# Altium PCB Board2.PcbDoc (part 2 of 2)
Units mil, origin at the board's own origin, x right, y up, seen from the top; angles counter-clockwise.
Board outline 9249 x 8662 mil, 4 copper layers (Top Layer, VCC, GND, Bottom Layer); 176 components, 329 nets, 1628 pads, 337 vias.
Unrouted connection lines stored in the file: 397.
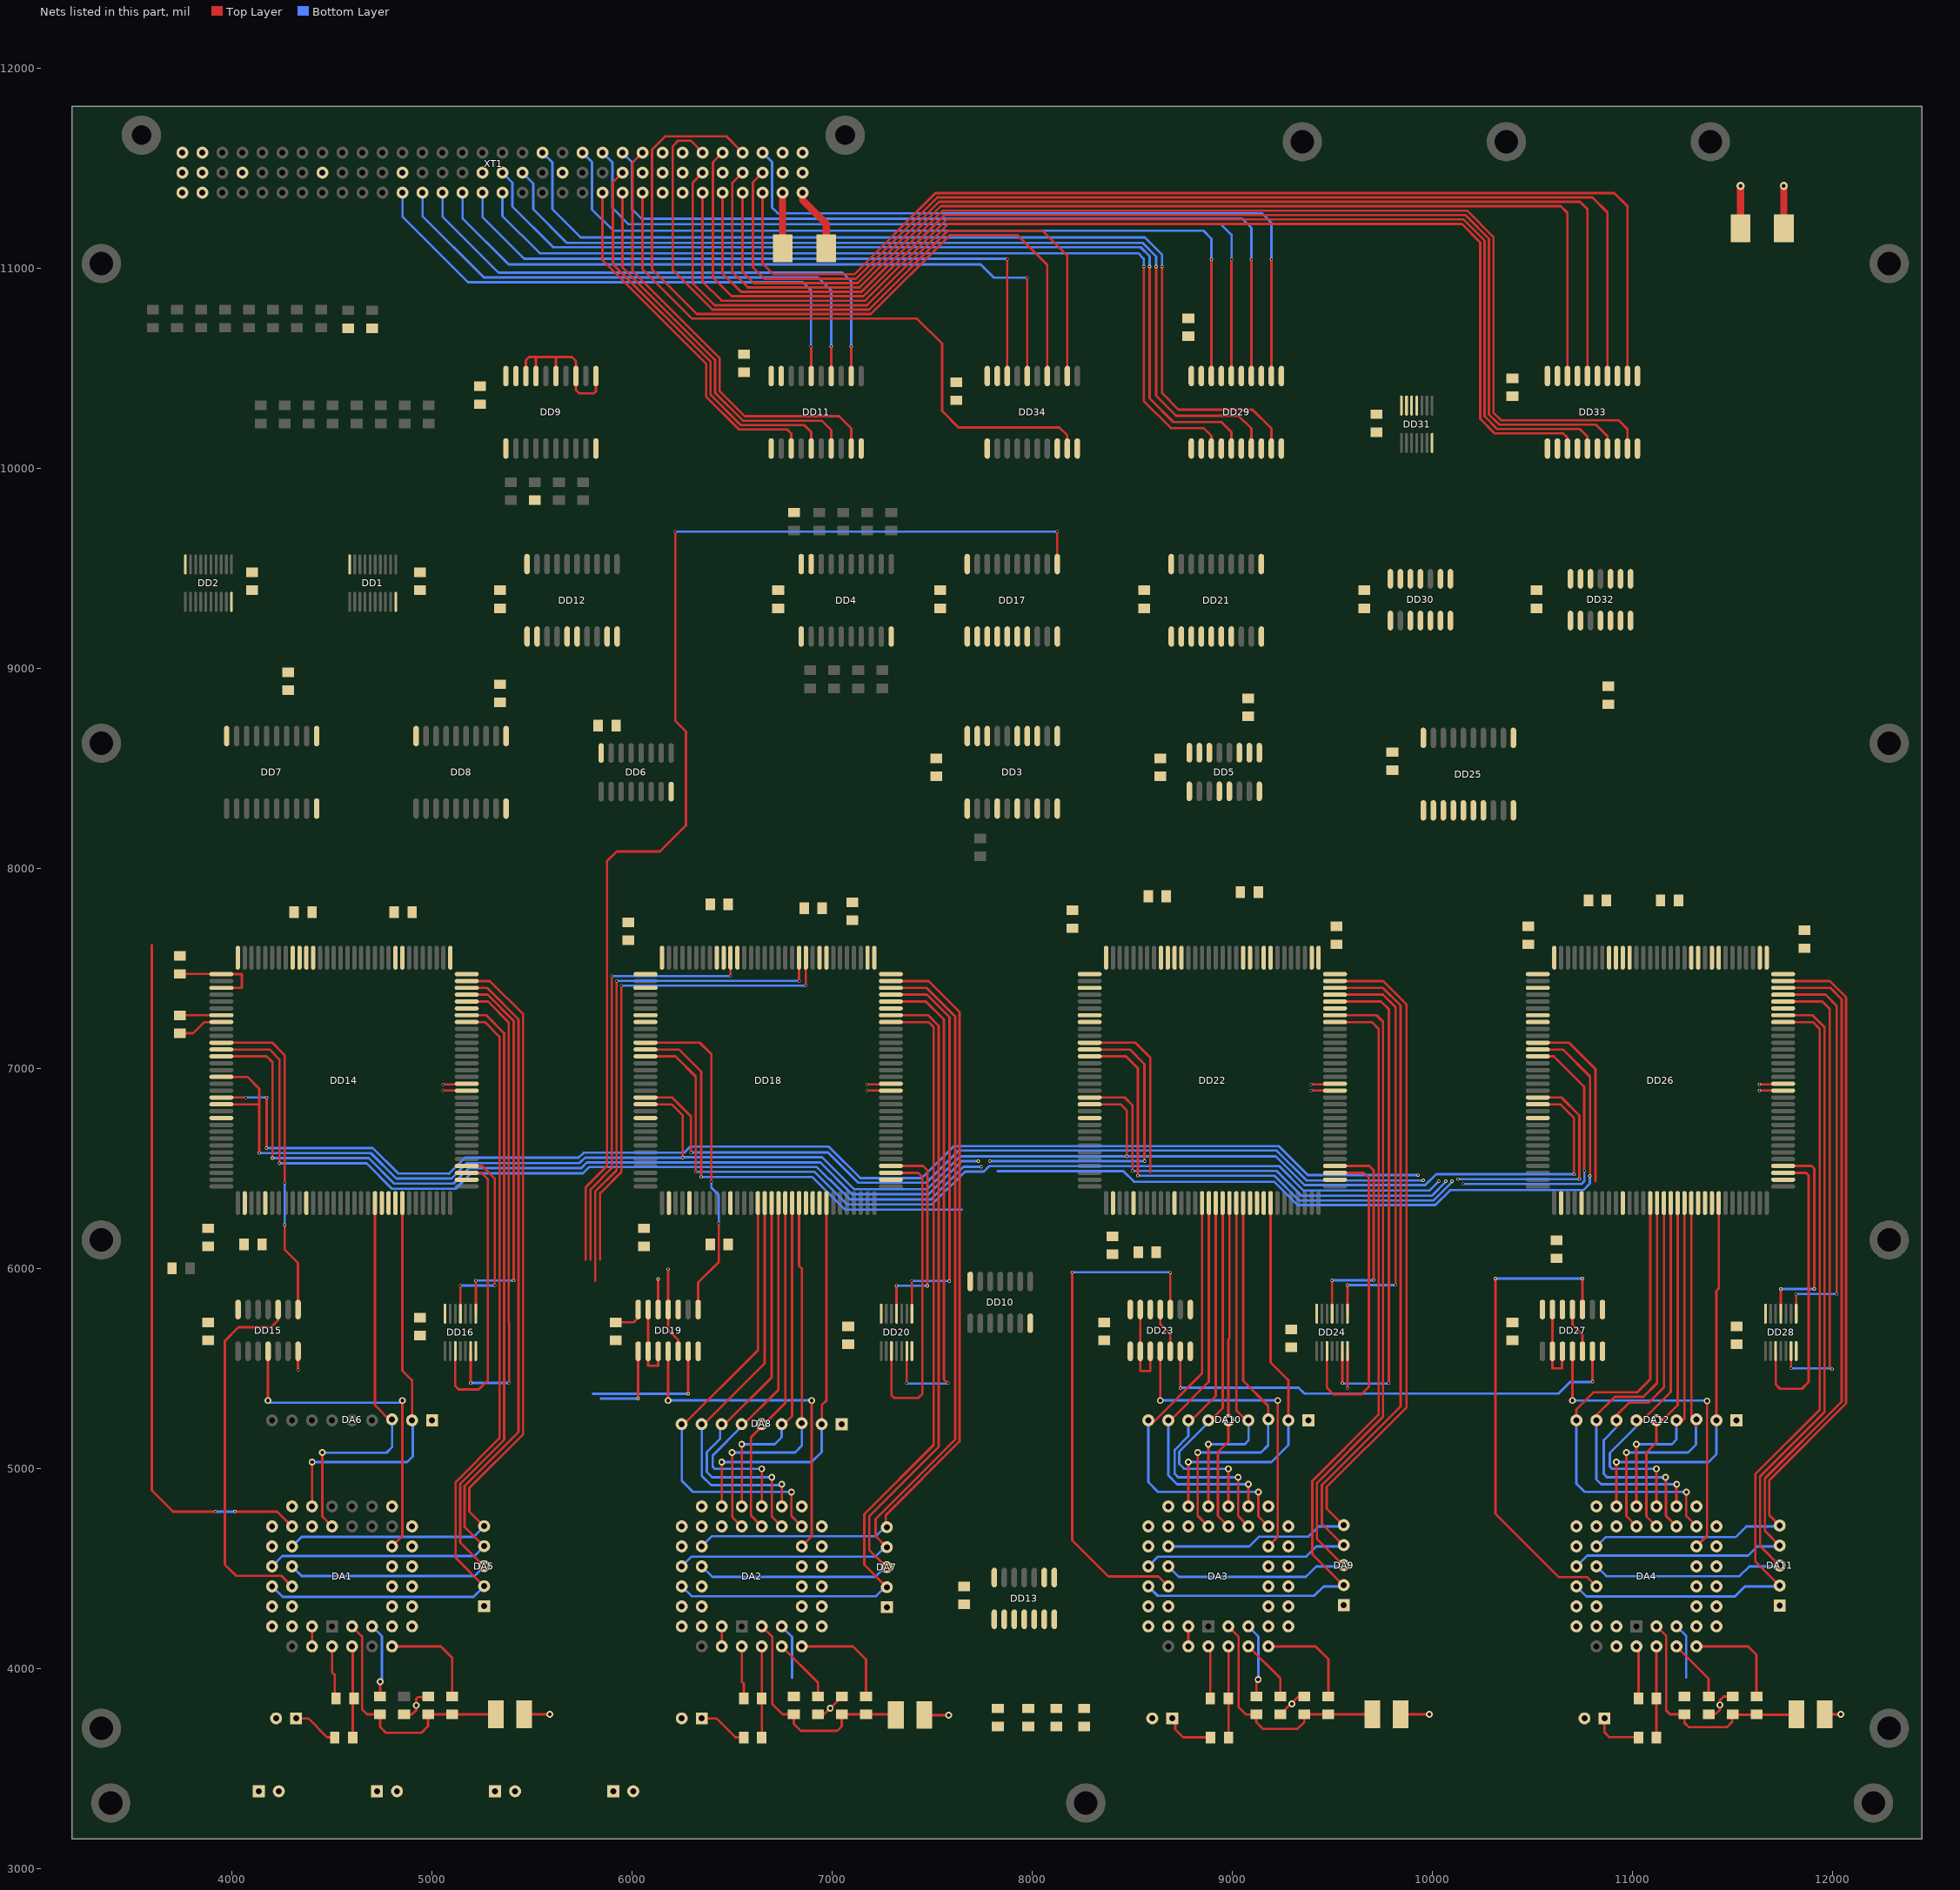
[diagram p4: the nets of this part, all layers, seen from the top]

## Via types
v1: diameter 16, hole 10, Top Layer to Bottom Layer, 289 vias
v2: diameter 34, hole 18, Top Layer to Bottom Layer, 46 vias
v3: diameter 40, hole 20, Top Layer to Bottom Layer, 2 vias

## Nets (pads, with @x,y where several pads share a name; then routed paths per layer and width w, separated by ;. In a path a pad name is that pad's centre, name@x,y a point inside that pad or via, vN(x,y) a via of type N, cw(c..) or ccw(c..) an arc to the next point about the centre after c; other vN are vias at no path point) (continued)
B73: DD11.16 XT1.12C | length 2742.7
  Top Layer w12: DD11.16@6895,10461.1 v1@6895,10609
  Bottom Layer w12: XT1.12C@4852,11378 4852,11258 5180,10930 6853,10930 6894,10889 v1(6894,10609)
B74: DD11.14 XT1.13C | length 2742
  Top Layer w12: DD11.14@6995,10461.1 v1(6995,10609)
  Bottom Layer w12: XT1.13C@4952,11378 4952,11261 5259,10954 6930,10954 6995,10889 v1(6995,10609)
B75: DD11.12 XT1.14C | length 2770.1
  Top Layer w12: DD11.12@7095,10461.1 v1(7095,10609)
  Bottom Layer w12: XT1.14C@5052,11378 5052,11258 5332,10978 7051,10978 7095,10934 v1(7095,10609)
B76: DD11.9 XT1.24A | length 2229
  Top Layer w12: XT1.24A@6052,11578 6002,11528 6002,10986 6437,10551 6437,10386 6563,10260 7035,10260 7095,10200 DD11.9@7095,10098.9
B77: DD11.7 XT1.23C | length 1942.5
  Top Layer w12: XT1.23C@5952,11378 5952,11004 6414.37,10541.63 6414.37,10376.63 6553,10238 6948,10238 6995,10191 DD11.7@6995,10098.9
B78: DD11.5 XT1.23B | length 1994.9
  Top Layer w12: XT1.23B@5952,11478 5904,11430 5904,11020.44 6392.06,10532.39 6392.06,10367.39 6543.44,10216 6860,10216 6895,10181 DD11.5@6895,10098.9
B79: DD11.3 XT1.22C | length 1810.9
  Top Layer w12: XT1.22C@5852,11378 5852,11041 6369.82,10523.18 6369.82,10358.18 6534,10194 6775,10194 6795,10174 DD11.3@6795,10098.9
B80: DD12.2 DD30.1 DD30.4 DD30.5
B81: DD12.5 DD31.13
B82: DD12.6 DD29.11
B83: DD12.9 DD29.15
B84: DD14.99 DD16.3 | length 1486.9
  Top Layer w12: DD16.3@5116.02,5586.5 5116.02,5411.98 5133,5395 5233,5395 5279,5441 5279,6445 5246.4,6477.6 DD14.99@5173.19,6477.6
B85: DD14.125 DD16.8 | length 1942.2
  Top Layer w12: DD14.125@5173.19,7368.15 5276.85,7368.15 5408,7237 v1(5408,5939) ; DD16.8@5218.39,5773.5 v1(5218.39,5939)
  Bottom Layer w12: v1(5218.39,5939) v1(5408,5939)
B86: DD14.124 DD16.6 | length 2410.4
  Top Layer w12: DD14.124@5173.19,7333.9 5279.1,7333.9 5382.53,7230.47 5382.53,5729.47 5385,5727 v1(5385,5426) ; v1(5192.8,5426) DD16.6@5192.8,5586.5
  Bottom Layer w12: v1@5192.8,5427 v1@5385,5427
B87: DD14.100 DD16.11 | length 1011.3
  Top Layer w12: DD16.11@5141.61,5773.5 v1(5141.61,5913.61) ; DD14.100@5173.19,6511.85 5250.15,6511.85 5313,6449 v1(5313,5915)
  Bottom Layer w12: v1(5141.61,5913.61) v1@5313,5913.61
B88: DD13.1 DD14.44 | length 4569.6
  Top Layer w12: DD14.44@3946.81,7094.13 4187.43,7094.13 4236.75,7044.81 v1@4236.75,6525
  Bottom Layer w12: v1(4237,6525) 4672.52,6525 4799.52,6398 5117.77,6398 5194.77,6475 5754,6475 5786,6507 6922,6507 6986,6443 6989.81,6443 7087.81,6345 7493.77,6345 7656.77,6508 v1(7744,6508)
B89: DD14.48 DD14.52 DD18.52 DD22.52 DD26.52 DD29.13 | length 8946.1
  Top Layer w12: DD14.52@3946.81,6820.12 4136,6820.12 ; DD14.48@3946.81,6957.13 4076.87,6957.13 4136,6898 v1@4136,6578 ; DD18.52@6066.81,6820.12 6196.88,6820.12 6253,6764 v1(6253,6553) ; DD22.52@8286.81,6820.12 8440.88,6820.12 8473,6788 v1(8473,6560) ; DD26.52@10526.81,6820.12 10639.88,6820.12 10708,6752 v1@10708,6471
  Bottom Layer w12: v1(4136,6576) 4693.64,6576 4820.64,6449 5096.64,6449 5173.64,6526 5737,6526 5764,6553 v1(6253,6553) ; v1@6253,6555 6949.94,6555 7108.94,6396 7475,6396 7639,6560 9217,6560 9361,6416 9964,6416 10019,6471 v1@10709,6471
  other v1: 10709,6470
B90: DA1.30 DD14.22 | length 3501.6
  Top Layer w12: 3599,7616 3599,4890 3705,4784 v1(3917,4784) ; v1(4014,4784) 4226,4784 DA1.30@4300,4710
  Bottom Layer w12: v1(3917,4784) v1(4014,4784)
B91: DA2.30 DD18.22 | length 2146.7
  Top Layer w12: 5792,6044 5792,6395.06 5898,6501.06 v1(5898,7461) ; v1(6491.61,7461) DD18.22@6491.61,7553.19
  Bottom Layer w12: v1(5898,7461) v1(6491.61,7461)
B92: DA3.30 DD22.22
B93: DA4.30 DD26.22
B94: LED1.1 R35.2
B95: LED2.1 R41.2
B96: LED3.1 R47.2
B97: LED4.1 R53.1
B98: DD14.51 DD32.9 | length 6535.5
  Top Layer w12: DD14.51@3946.81,6854.37 v1(4069.63,6854.37) ; v1@4172.63,6601 v1@4172.63,6854.37
  Bottom Layer w12: v1(4069.63,6854.37) v1@4172.63,6854.37 ; v1@4172.63,6601 4704,6601 4831,6474 5083.95,6474 ; 5083.95,6472.37 5164.58,6553 5732.53,6553 5757.53,6578 6259,6578 6290,6609 6982,6609 7140,6451 7448,6451 7608,6611 9231.89,6611 9376.89,6466 v1(9928,6466)
  other v1: 4172,6601 4173,6854
B99: DD18.51 DD32.10 | length 4299
  Top Layer w12: DD18.51@6066.81,6854.37 6199.63,6854.37 6294,6760 v1(6294,6579)
  Bottom Layer w12: v1@6294,6580 6979,6580 7131,6428 7470,6428 7631,6589 9222,6589 9371.94,6439.06 v1(9954,6440.05)
B100: DD22.51 DD32.12 | length 2199.6
  Top Layer w12: DD22.51@8286.81,6854.37 8461.63,6854.37 8501,6815 v1@8501,6493
  Bottom Layer w12: v1(8501,6487) 9221,6487 9345,6363 9997,6363 v1@10067.5,6433.5
  other v1: 10067.5,6436
B101: DD26.51 DD32.13 | length 1167.6
  Top Layer w12: DD26.51@10526.81,6854.37 10644.63,6854.37 10735,6764 v1@10735,6449
  Bottom Layer w12: v1(10128,6446) v1(10735,6446)
B102: DD14.45 DD29.17 | length 4506.3
  Top Layer w12: DD14.45@3946.81,7059.88 4173.24,7059.88 4202.5,7030.62 v1@4202.5,6551
  Bottom Layer w12: v1(4201,6551) 4683.29,6551 4810.29,6424 5107,6424 5184,6501 5745.88,6501 5773.88,6529 6940.58,6529 7098.58,6371 7483,6371 7648,6536 v1(7730,6536)
B103: DD18.45 DD32.1 | length 4699.6
  Top Layer w12: DD18.45@6066.81,7059.88 6217.12,7059.88 6318,6959 v1(6318,6483)
  Bottom Layer w12: v1(6318,6483) 6911,6483 7074,6320 7500,6320 7664,6484 7758,6484 7785,6511 9234,6511 9356,6389 9985,6389 v1(10032,6436)
B104: DD22.45 DD32.2 | length 2462
  Top Layer w12: DD22.45@8286.81,7059.88 8468.12,7059.88 8528,7000 v1(8528,6463)
  Bottom Layer w12: v1(8528,6463) 9211.06,6463 9335.06,6339 10005,6339 10096,6430 v1@10098,6430
  other v1: 10098,6436
B105: DD26.45 DD32.4 | length 1380.3
  Top Layer w12: DD26.45@10526.81,7059.88 10607.12,7059.88 10759,6908 v1@10759,6488
  Bottom Layer w12: v1(10153,6422) 10745,6422 10760,6437 v1(10760,6489)
B106: C45.2 P1.1 | length 232.4
  Top Layer w12: P1.1@4320,3750 4381,3750 4476,3655 C45.2@4513,3655
B107: C49.2 P2.1 | length 249.4
  Top Layer w12: P2.1@6348,3750 6421,3750 6516,3655 C49.2@6558,3655
B108: C53.2 P3.1 | length 254.4
  Top Layer w12: P3.1@8700,3750 8715,3735 8715,3694 8754,3655 C53.2@8891,3655
B109: C57.2 P4.1 | length 250.4
  Top Layer w12: P4.1@10860,3750 10860,3680 10884,3656 11029,3656 C57.2@11030,3655
B110: C1.2 C47.1 C51.1 C55.1 C59.1 DA1.44 DA2.44 DA3.44 DA4.44 P1.2 P2.2 P3.2 P4.2 R36.1 R37.2 R42.1 R43.2 R48.1 R49.2 R54.1 R55.2 XT1.26A XT1.26B XT1.26C | length 1963.5
  Top Layer w12: DA1.44@4500,4110 4500,3982 4513,3969 R36.1@4513,3855 ; R37.2@4860,3770 4900,3770 4921,3791 4921,3848 4929,3856 4976,3856 C47.1@4980,3860 ; DA2.44@6548,4110 6548,3934 6558,3924 R42.1@6558,3850 ; R43.2@6929,3770 6959,3770 C51.1@7049,3860 ; DA3.44@8880,4110 8890,4100 R48.1@8890,3850 ; R49.2@9240,3770 9330,3860 C55.1@9360,3860 ; DA4.44@11021,4119 11030,4110 R54.1@11030,3850 ; R55.2@11381,3770 11385,3774 11418,3774 11437,3793 11437,3841 11456,3860 C59.1@11501,3860
  Top Layer w36: C1.2@11756.54,11200 v3@11756.54,11411.46
  other v2: 6990,3801 4921,3815 11437,3817 9297,3823
  other v3: 11756,11412
B111: DD17.11 DD19.1 | length 6488
  Top Layer w12: 5768,6044 5768,6405 5874,6511 5874,8035 5923,8084 6138,8084 6269,8215 6269,8684 6216,8737 v1(6216,9683) ; v1(6030,5349) DD19.1@6030,5585.67 ; DD17.11@8125,9521.1 v1(8125,9683)
  Bottom Layer w12: 5844,5349 v1(6030,5349) ; v1(6216,9683) v1(8125,9683)
B112: DD21.11 DD23.1
B113: DD25.11
B114: DA2.19 DA8.9 DD17.3 DD18.79 | length 2310.6
  Top Layer w12: DA8.9@6248,5210 6628.62,5590.62 DD18.79@6628.62,6326.81 ; v2(6796,4882) 6796,4762 DA2.19@6848,4710
  Bottom Layer w12: DA8.9@6248,5210 6248,4939 6305,4882 v2(6796,4882)
B115: DA2.20 DA8.8 DD17.4 DD18.80 | length 2026.8
  Top Layer w12: DA8.8@6348,5210 6662.87,5524.87 DD18.80@6662.87,6326.81 ; DA2.20@6748,4810 v2(6748,4921)
  Bottom Layer w12: DA8.8@6348,5210 6348,4963 6395,4916 6743,4916 v2(6748,4921)
B116: DA2.21 DA8.7 DD17.7 DD18.81 | length 2081.5
  Top Layer w12: DA8.7@6448,5205 6697.13,5454.13 DD18.81@6697.13,6326.81 ; v2(6698,4955) 6698,4760 DA2.21@6748,4710
  Bottom Layer w12: DA8.7@6448,5205 6440,5197 6440,5148 6373,5081 6373,4981 6399,4955 v2(6698,4955)
B117: DA3.19 DA10.9 DD21.3 DD22.79 | length 2284.3
  Top Layer w12: DA10.9@8580,5230 8604.19,5230 8848.62,5474.44 DD22.79@8848.62,6326.81 ; v2(9130,4882) 9130,4760 DA3.19@9180,4710
  Bottom Layer w12: DA10.9@8580,5230 8580,4931 8629,4882 v2(9130,4882)
B118: DA3.20 DA10.8 DD21.4 DD22.80 | length 1975.1
  Top Layer w12: DA10.8@8680,5230 8882.87,5432.87 DD22.80@8882.87,6326.81 ; DA3.20@9080,4810 v2(9080,4921)
  Bottom Layer w12: DA10.8@8680,5230 8680,4965 8724,4921 v2(9080,4921)
B119: DA3.21 DA10.7 DD21.7 DD22.81 | length 2029.9
  Top Layer w12: DA10.7@8780,5225 8917.13,5362.13 DD22.81@8917.13,6326.81 ; v2(9029,4955) 9029,4761 DA3.21@9080,4710
  Bottom Layer w12: DA10.7@8780,5225 8780,5161.11 8712,5093.11 8712,4972 8729,4955 v2(9029,4955)
B120: DA4.19 DA12.9 DD25.3 DD26.79 | length 2442.7
  Top Layer w12: 10720,5210 10720,5295 10805,5380 11023,5380 11088.62,5445.62 DD26.79@11088.62,6326.81 ; v2(11269,4882) 11269,4761 DA4.19@11320,4710
  Bottom Layer w12: 10720,5210 10720,4924 10762,4882 v2(11269,4882)
B121: DA4.20 DA12.8 DD25.4 DD26.80 | length 2113.6
  Top Layer w12: 10820,5210 10820,5266 10912,5358 11055,5358 11122.87,5425.87 DD26.80@11122.87,6326.81 ; DA4.20@11220,4810 v2@11220,4921
  Bottom Layer w12: 10820,5210 10820,4944 10843,4921 v2(11221,4921)
B122: DA4.21 DA12.7 DD25.7 DD26.81 | length 2119.9
  Top Layer w12: 10920,5205 10920,5265 10983,5328 11081,5328 11157.13,5404.13 DD26.81@11157.13,6326.81 ; v2@11167,4955 11167,4763 DA4.21@11220,4710
  Bottom Layer w12: 10920,5205 10856,5141 10856,4972 10873,4955 v2(11165,4955)
B123: DD17.2 DD29.4
B124: DD17.5 DD29.6
B125: DD17.6 DD29.8
B126: DD21.2 DD33.6
B127: DD21.5 DD33.8
B128: DD21.6 DD33.11
B129: DD25.2 DD33.13
B130: DD25.5 DD33.15
B131: DD25.6 DD33.17
B132: DD18.99 DD20.3 | length 1639.2
  Top Layer w12: DD18.99@7293.19,6477.6 7429.4,6477.6 7451,6456 7451,5373 7430,5352 7311,5352 7296.02,5366.98 DD20.3@7296.02,5586.5
B133: DD18.125 DD20.8 | length 2009.4
  Top Layer w12: DD18.125@7293.19,7368.15 7473.85,7368.15 7586,7256 v1(7586,5936) ; DD20.8@7398.39,5773.5 v1(7398.39,5937)
  Bottom Layer w12: v1(7398.39,5937) v1@7585,5937
B134: DD18.124 DD20.6 | length 2497.2
  Top Layer w12: DD18.124@7293.19,7333.9 7468.1,7333.9 7558,7244 7558,5445 v1@7579,5424 ; v1(7372.8,5426) DD20.6@7372.8,5586.5
  Bottom Layer w12: v1@7372.8,5424 v1@7578.8,5424
  other v1: 7579,5426
B135: DD18.100 DD20.11 | length 1062.7
  Top Layer w12: DD18.100@7293.19,6511.85 7454.15,6511.85 7476,6490 v1(7476,5912) ; DD20.11@7321.61,5773.5 v1(7321.61,5912.61)
  Bottom Layer w12: v1(7321.61,5912.61) v1@7475.39,5912.61
B136: DD22.99 DD24.3 | length 1645.7
  Top Layer w12: DD24.3@9473.02,5586.5 9473.02,5401.98 9504,5371 9645,5371 9682,5408 9682,6453 9657.4,6477.6 DD22.99@9513.19,6477.6
B137: DD22.125 DD24.8 | length 2100.5
  Top Layer w12: DD22.125@9513.19,7368.15 9752.85,7368.15 9816,7305 v1(9816,5917) ; DD24.8@9575.39,5773.5 v1(9575.39,5916)
  Bottom Layer w12: v1(9575.39,5916) 9815,5916 v1(9816,5917)
B138: DD22.124 DD24.6 | length 2547.2
  Top Layer w12: DD22.124@9513.19,7333.9 9744.1,7333.9 9782,7296 v1(9782,5426) ; v1(9549.8,5426) DD24.6@9549.8,5586.5
  Bottom Layer w12: v1@9549.8,5424 v1@9782,5424
B139: DD22.100 DD24.11 | length 1126.1
  Top Layer w12: DD24.11@9498.61,5773.5 v1(9498.61,5940.61) ; DD22.100@9513.19,6511.85 9685.15,6511.85 9706,6491 v1(9706,5941)
  Bottom Layer w12: v1(9498.61,5940.61) 9705.61,5940.61 v1(9706,5941)
B140: DD26.99 DD28.3 | length 1520.7
  Top Layer w12: DD28.3@11716.02,5586.5 11716.02,5419.98 11738,5398 11847,5398 11881,5432 11881,6465 11868.4,6477.6 DD26.99@11753.19,6477.6
B141: DD26.125 DD28.8 | length 2032.4
  Top Layer w12: DD26.125@11753.19,7368.15 11965.85,7368.15 12021,7313 v1(12021,5872) ; DD28.8@11818.39,5773.5 v1(11818.39,5871.39)
  Bottom Layer w12: v1(11818.39,5871.39) 12020.39,5871.39 v1(12021,5872)
B142: DD26.124 DD28.6 | length 2341.4
  Top Layer w12: DD26.124@11753.19,7333.9 11949.1,7333.9 11986,7297 11986,5508 v1(11998,5496) ; v1(11792.8,5500.2) DD28.6@11792.8,5586.5
  Bottom Layer w12: v1(11792.8,5500.2) v1@11993.8,5500.2
B143: DD26.100 DD28.11 | length 1053.2
  Top Layer w12: DD28.11@11741.61,5773.5 v1@11741.61,5894.61 ; DD26.100@11753.19,6511.85 11896.15,6511.85 11909,6499 v1@11909,5895
  Bottom Layer w12: v1(11741.61,5896.61) v1@11908.61,5896.61
  other v1: 11909,5897
B144: DD18.11 DD19.6 | length 3163.8
  Top Layer w12: 5840,6044 5840,6375.18 5946,6481.18 v1(5946,7413) ; v1(6280,5373) DD19.6@6280,5585.67 ; v1@6868.39,7413 DD18.11@6868.39,7553.19
  Bottom Layer w12: 5804,5373 v1(6280,5373) ; v1(5946,7413) v1(6868,7413)
B145: DD18.12 DD19.12 | length 2722.8
  Top Layer w12: 5816,5938 5816,6385.12 5922,6491.12 v1(5922,7437) ; DD19.12@6130,5794.33 v1(6130,5947) ; v1@6834.13,7434 DD18.12@6834.13,7553.19
  Bottom Layer w12: v1@5927,7437 v1(6835,7437)
B146: DD22.11
B147: DD22.12 DD23.12
B148: DD23.6 DD26.11 DD27.6 | length 2424.9
  Top Layer w12: v1@8740,5404 DD23.6@8740,5585.67 ; v1@10800,5440 DD27.6@10800,5585.67
  Bottom Layer w12: v1@8740,5403 9331,5403 9360,5374 10630,5374 10688,5432 10793,5432 v1@10799,5438
  other v1: 8740,5401 10801,5434
B149: DD26.12 DD27.12
B150: DD29.7 XT1.18B | length 4756.5
  Top Layer w12: v1(8619,11008) 8619,10362.57 8718.57,10263 9031,10263 9095,10199 DD29.7@9095,10098.9
  Bottom Layer w12: XT1.18B@5452,11478 5506,11424 5506,11295 5674,11127 8551.11,11127 8619,11059.11 v1(8619,11008)
B151: DD13.3 DD18.44 | length 2219.7
  Top Layer w12: DD18.44@6066.81,7094.13 6233.87,7094.13 6345,6983 v1(6345,6457)
  Bottom Layer w12: v1(6345,6457) 6900.23,6457 7063.23,6294 7647,6294
B152: DD13.5 DD22.44 | length 1559.5
  Top Layer w12: DD22.44@8286.81,7094.13 8487.87,7094.13 8561,7021 v1@8561,6539
  Bottom Layer w12: v1(7788,6536) v1(8561,6536)
B153: DD13.9 DD26.44 | length 3925.3
  Top Layer w12: DD26.44@10526.81,7094.13 10652.87,7094.13 10788,6959 v1@10788,6464
  Bottom Layer w12: 7827,6486 8455,6486 8508,6433 9209,6433 9326,6316 10014,6316 10089,6391 10754,6391 10787,6424 v1(10787,6462)
B154: DD34.18 XT1.16C | length 3417.1
  Top Layer w12: DD34.18@7875,10461.1 v1(7875,11047)
  Bottom Layer w12: XT1.16C@5252,11378 5252,11256 5460,11048 v1@7875,11048
B155: DD34.16 XT1.15C | length 3565.9
  Top Layer w12: DD34.16@7975,10461.1 v1(7975,10953)
  Bottom Layer w12: XT1.15C@5152,11378 5152,11250 5383,11019 7742,11019 7808,10953 v1(7975,10953)
B156: DD34.14 XT1.29A | length 3962.1
  Top Layer w12: XT1.29A@6552,11578 6470,11660 6166,11660 6099,11593 6099,10995 6323,10771 7193.11,10771 7588.11,11166 7925,11166 8075,11016 DD34.14@8075,10461.1
B157: DD32.6 DD33.2 DD34.8
B158: DD34.12 XT1.27A | length 3675.2
  Top Layer w12: XT1.27A@6352,11578 6292,11638 6231,11638 6203,11610 6203,10991 6401,10793 7184,10793 7579,11188 8049,11188 8175,11062 DD34.12@8175,10461.1
B159: DD34.9 XT1.24C | length 3112.1
  Top Layer w12: XT1.24C@6052,11378 6052,10996 6300,10748 7424,10748 7549,10623 7549,10286 7631,10204 8135,10204 8175,10164 DD34.9@8175,10098.9
B160: DD3.14 DD5.5
C02: DD32.8 DD33.4
D01: DD29.18 XT1.21A | length 4146.8
  Top Layer w12: DD29.18@8895,10461.1 v1(8895,11044)
  Bottom Layer w12: XT1.21A@5752,11578 5799,11531 5799,11294 5905,11188 8855,11188 8895,11148 v1(8895,11044)
D02: DD29.9 XT1.19A | length 4856.9
  Top Layer w12: v1(8649,11008) 8649,10375 8731,10293 9101,10293 9195,10199 DD29.9@9195,10098.9
  Bottom Layer w12: XT1.19A@5552,11578 5601,11529 5601,11295 5742,11154 8562.3,11154 8649,11067.3 v1(8649,11008)
D03: DD29.16 XT1.22A | length 4152.7
  Top Layer w12: DD29.16@8995,10461.1 v1@8995,11043
  Bottom Layer w12: XT1.22A@5852,11578 5901,11529 5901,11301 5982,11220 8943,11220 8996,11167 v1(8996,11044)
D04: DD29.14 XT1.23A | length 4176.7
  Top Layer w12: DD29.14@9095,10461.1 v1(9095,11044)
  Bottom Layer w12: XT1.23A@5952,11578 5998,11532 5998,11298 6048,11248 9049,11248 9095,11202 v1(9095,11044)
D05: DD29.12 XT1.30A | length 3587.8
  Top Layer w12: DD29.12@9195,10461.1 v1(9195,11044)
  Bottom Layer w12: XT1.30A@6652,11578 6699,11531 6699,11303 6727,11275 9147,11275 9195,11227 v1(9195,11044)
D06: DD29.5 XT1.17B | length 4748.9
  Top Layer w12: v1(8587,11008) 8587,10349.32 8705.32,10231 8945,10231 8995,10181 DD29.5@8995,10098.9
  Bottom Layer w12: XT1.17B@5352,11478 5402,11428 5402,11308 5605,11105 8542,11105 8587,11060 v1(8587,11008)
D07: DD29.3 XT1.17C | length 4595.2
  Top Layer w12: v1(8557,11008) 8557,10336.89 8692.89,10201 8857,10201 8895,10163 DD29.3@8895,10098.9
  Bottom Layer w12: XT1.17C@5352,11378 5352,11261 5538,11075 8529.57,11075 8557,11047.57 v1(8557,11008)
D08: DD33.18 XT1.29B | length 5722
  Top Layer w12: XT1.29B@6552,11478 6500,11426 6500,10983 6579,10904 7137.23,10904 7543.23,11310 10642,11310 10675,11277 DD33.18@10675,10461.1
D09: DD33.16 XT1.29C | length 5659.3
  Top Layer w12: XT1.29C@6552,11378 6552,10982.58 6608.58,10926 7128.11,10926 7534.11,11332 10738,11332 10775,11295 DD33.16@10775,10461.1
D10: DD33.14 XT1.30B | length 5805.1
  Top Layer w12: XT1.30B@6652,11478 6604,11430 6604,11004.12 6660.12,10948 7119,10948 7525,11354 10800,11354 10875,11279 DD33.14@10875,10461.1
D11: DD33.12 XT1.30C | length 5743.8
  Top Layer w12: XT1.30C@6652,11378 6652,11024 6706,10970 7109.89,10970 7515.89,11376 10909,11376 10975,11310 DD33.12@10975,10461.1
D12: DD33.9 XT1.28C | length 6197.1
  Top Layer w12: XT1.28C@6452,11378 6452,10973.88 6543.88,10882 7146.34,10882 7552.34,11288 10174,11288 10305,11157 10305,10278 10343,10240 10930,10240 10975,10195 DD33.9@10975,10098.9
D13: DD33.7 XT1.28A | length 6356.7
  Top Layer w12: XT1.28A@6452,11578 6404,11530 6404,10954 6498,10860 7155.45,10860 7561.45,11266 10164.89,11266 10283,11147.89 10283,10268.89 10333.89,10218 10818,10218 10875,10161 DD33.7@10875,10098.9
D14: DD33.5 XT1.27C | length 6100.3
  Top Layer w12: XT1.27C@6352,11378 6352,10932.46 6446.46,10838 7164.56,10838 7570.56,11244 10155.77,11244 10261,11138.77 10261,10259.77 10324.77,10196 10738,10196 10775,10159 DD33.5@10775,10098.9
D15: DD33.3 XT1.27B | length 6173.3
  Top Layer w12: XT1.27B@6352,11478 6303,11429 6303,10924 6412,10815 7174,10815 7580,11221 10147,11221 10239,11129 10239,10247 10312,10174 10655,10174 10675,10154 DD33.3@10675,10098.9
DD19_5: DD18.2 DD19.5 DD19.11 | length 431
  Top Layer w12: v1(6180,5996) 6180,5692 6230,5642 DD19.5@6230,5585.67
DD19_8: DD18.43 DD19.8 | length 1687
  Top Layer w12: DD18.43@6066.81,7128.39 6337.61,7128.39 6396,7070 v1(6396,6433) ; DD19.8@6330,5794.33 6330,5929 6433,6032 v1(6433,6224)
  Bottom Layer w12: v1(6396,6433) 6396,6403 6433,6366 v1(6433,6224)
DD19_13: DD19.2 DD19.3 DD19.13 | length 412.7
  Top Layer w12: DD19.13@6080,5803 6080,5513 6130,5513 DD19.3@6130,5585.67
DD31_11: DD29.2 DD31.11
GND: C2.2 C3.1 C4.1 C5.1 C6.1 C7.1 C8.1 C9.1 C10.1 C11.1 C12.1 C13.1 C14.1 C15.1 C16.1 C17.1 C18.1 C19.1 C20.1 C21.1 C22.1 C23.1 C24.1 C25.1 C26.1 C27.1 C28.1 C29.1 C30.1 C31.1 C32.1 C33.1 C34.1 C35.1 C36.1 C37.1 C38.1 C39.1 C40.1 C41.1 C42.1 C43.1 C61.1 DA1.7 DA1.8 DA1.9 DA1.10 DA1.11 DA1.12 DA1.13 DA1.14 DA1.15 DA1.18 DA1.27 DA1.29 DA1.31 DA1.37 DA1.38 DA1.41 DA1.42 DA1.43 DA2.7 DA2.8 DA2.9 DA2.10 DA2.11 DA2.12 DA2.13 DA2.14 DA2.15 DA2.18 DA2.27 DA2.29 DA2.31 DA2.37 DA2.38 DA2.41 DA2.42 DA2.43 DA3.7 DA3.8 DA3.9 DA3.10 DA3.11 DA3.12 DA3.13 DA3.14 DA3.15 DA3.18 DA3.27 DA3.29 DA3.31 DA3.37 DA3.38 DA3.41 DA3.42 DA3.43 DA4.7 DA4.8 DA4.9 DA4.10 DA4.11 DA4.12 DA4.13 DA4.14 DA4.15 DA4.18 DA4.27 DA4.29 DA4.31 DA4.37 DA4.38 DA4.41 DA4.42 DA4.43 DD1.10 DD2.10 DD3.1 DD3.10 DD3.19 DD4.1 DD4.10 DD4.19 DD5.1 DD5.8 DD5.9 DD5.10 DD5.14 DD5.15 DD6.8 DD7.1 DD7.10 DD8.1 DD8.10 DD9.1 DD9.10 DD9.19 DD10.7 DD11.1 DD11.10 DD11.19 DD12.1 DD12.10 DD13.7 DD14.1 DD14.8 DD14.21 DD14.23 DD14.32 DD14.40 DD14.54 DD14.75 DD14.86 DD14.88 DD14.98 DD14.112 DD14.123 DD14.128 DD15.7 DD16.7 DD17.1 DD17.10 DD18.8 DD18.21 DD18.23 DD18.32 DD18.40 DD18.54 DD18.75 DD18.86 DD18.88 DD18.98 DD18.112 DD18.123 DD18.128 DD19.7 DD20.7 DD21.1 DD21.10 DD22.1 DD22.8 DD22.21 DD22.23 DD22.32 DD22.40 DD22.54 DD22.75 DD22.86 DD22.88 DD22.98 DD22.112 DD22.123 DD23.7 DD24.7 DD25.1 DD25.10 DD26.8 DD26.21 DD26.23 DD26.32 DD26.40 DD26.54 DD26.75 DD26.86 DD26.88 DD26.98 DD26.112 DD26.123 DD27.7 DD28.7 DD29.1 DD29.10 DD29.19 DD30.7 DD31.7 DD32.7 DD33.1 DD33.10 DD33.19 DD34.1 DD34.10 DD34.19 XT1.2A XT1.2B XT1.2C XT1.4B XT1.8B XT1.12B XT1.16B XT1.20B XT1.24B XT1.28B XT1.31A XT1.31B XT1.31C | length 1568.9
  Top Layer w12: C27.1@3740,7175 3806,7175 3862.14,7231.14 DD14.40@3946.81,7231.14 ; v1@4330,5493 DD15.7@4330,5585.67 ; DA1.42@4400,4110 DA1.43@4400,4210 ; v1(5055,6920) DD14.112@5170.31,6920 ; DA2.42@6448,4110 DA2.43@6448,4210 ; v1(7175,6920) DD18.112@7290.31,6920 ; DA3.42@8780,4110 8780,4213 DA3.43@8795,4228 ; v1(9395,6920) DD22.112@9510.31,6920 ; v1@9575.39,5402.39 DD24.7@9575.39,5586.5 ; v1(11635,6920) DD26.112@11750.31,6920
  Top Layer w36: C2.2@6752,11101.46 XT1.31C@6752,11378
  other v1: 9575.39,5399.39 4331,5491
H04: DA2.22 DA8.6 DD18.82 | length 1892.6
  Top Layer w12: DA8.6@6548,5210 6731.38,5393.38 DD18.82@6731.38,6326.81 ; DA2.22@6648,4810 v2(6648,4998)
  Bottom Layer w12: DA8.6@6548,5210 6403,5065 6403,5007 6412,4998 v2(6648,4998)
H05: DA2.23 DA8.5 DD18.83 | length 1710.3
  Top Layer w12: DA2.23@6648,4710 6594,4764 6594,5156 6765.63,5327.63 DD18.83@6765.63,6326.81
H06: DA2.24 DA8.4 DD18.84 | length 1717.2
  Top Layer w12: DA2.24@6548,4810 v2(6548,5121) ; DA8.4@6748,5210 6799.88,5261.88 DD18.84@6799.88,6326.81
  Bottom Layer w12: v2(6548,5121) 6712,5121 6747,5156 6747,5209 DA8.4@6748,5210
H07: DA2.25 DA8.3 DD18.85 | length 1970.5
  Top Layer w12: v2(6500,5079) 6500,4758 DA2.25@6548,4710 ; DD18.85@6834.13,6326.81 6834.13,6012.87 6848,5999 DA8.3@6848,5210
  Bottom Layer w12: v2(6500,5079) 6814,5079 6848,5113 DA8.3@6848,5210
H08: DA2.26 DA8.2 DD18.89 | length 1992.9
  Top Layer w12: DA2.26@6448,4810 v2@6448,5028 ; DA8.2@6948,5210 6948,5316 6971.14,5339.14 DD18.89@6971.14,6326.81
  Bottom Layer w12: v2(6448,5031) 6896,5031 6947,5082 6947,5209 DA8.2@6948,5210
K01: DA2.32 DA7.5 DD18.127 | length 4093.6
  Top Layer w12: DA7.5@7268,4710 7268,4766 7637,5135 7637,7281 7481.35,7436.65 DD18.127@7293.19,7436.65
  Bottom Layer w12: DA2.32@6348,4610 6399,4661 7219,4661 DA7.5@7268,4710
K02: DA2.33 DA7.4 DD18.126 | length 4277.6
  Top Layer w12: DA7.4@7268,4610 7217,4661 7217,4746.78 7615,5144.78 7615,7259 7471.6,7402.4 DD18.126@7293.19,7402.4
  Bottom Layer w12: DA2.33@6248,4510 6297,4559 7217,4559 DA7.4@7268,4610
K03: DA2.34 DA7.3 DD18.122 | length 4105.5
  Top Layer w12: DA7.3@7268,4510 7185,4593 7185,4760.03 7532,5107.03 7532,7213 7479.61,7265.39 DD18.122@7293.19,7265.39
  Bottom Layer w12: DA2.34@6348,4510 6401,4457 7215,4457 DA7.3@7268,4510
K04: DA2.35 DA7.2 DD18.121 | length 4269.3
  Top Layer w12: DA7.2@7268,4410 7160,4518 7160,4770.39 7507,5117.39 7507,7206 7481.86,7231.14 DD18.121@7293.19,7231.14
  Bottom Layer w12: DA2.35@6248,4410 6297,4361 7219,4361 DA7.2@7268,4410
L07: DA1.25 DA6.3 DD14.85 | length 2006.7
  Top Layer w12: v2(4451,5079) 4451,4759 DA1.25@4500,4710 ; DD14.85@4714.13,6326.81 4714.13,5315.87 DA6.3@4800,5230
  Bottom Layer w12: v2(4451,5079) 4452,5078 4772,5078 4800,5106 DA6.3@4800,5230
L08: DA1.26 DA6.2 DD14.89 | length 2025.7
  Top Layer w12: DA1.26@4400,4810 v2(4400,5031) ; DD14.89@4851.14,6326.81 4851.14,5488.86 4900,5440 DA6.2@4900,5230
  Bottom Layer w12: v2(4400,5031) 4875,5031 4904,5060 4904,5226 DA6.2@4900,5230
M01: DA1.32 DA5.5 DD14.127 | length 4054.3
  Top Layer w12: DD14.127@5173.19,7436.65 5288.35,7436.65 5455,7270 5455,5171 5186,4902 5186,4784 DA5.5@5260,4710
  Bottom Layer w12: DA1.32@4300,4610 4348,4658 5208,4658 DA5.5@5260,4710
M02: DA1.33 DA5.4 DD14.126 | length 4213
  Top Layer w12: DD14.126@5173.19,7402.4 5274.6,7402.4 5432.16,7244.84 5432.16,5182.1 5162,4911.94 5162,4708 DA5.4@5260,4610
  Bottom Layer w12: DA1.33@4200,4510 4252,4562 5212,4562 DA5.4@5260,4610
M03: DA1.34 DA5.3 DD14.122 | length 4030.4
  Top Layer w12: DD14.122@5173.19,7265.39 5270.61,7265.39 5360,7176 5360,5143 5140,4923 5140,4630 DA5.3@5260,4510
  Bottom Layer w12: DA1.34@4300,4510 4348,4462 5212,4462 DA5.3@5260,4510
M04: DA1.35 DA5.2 DD14.121 | length 4195.5
  Top Layer w12: DD14.121@5173.19,7231.14 5263.86,7231.14 5337,7158 5337,5151.11 5118,4932.11 5118,4552 DA5.2@5260,4410
  Bottom Layer w12: DA1.35@4200,4410 4253,4357 5207,4357 DA5.2@5260,4410
NetC44_1: C44.1 C46.1 C47.2 DA1.3 L1.2 | length 1261.4
  Top Layer w12: DA1.3@4600,4210 4650,4160 4650,3796 4676,3770 C46.1@4740,3770 4740,3707 4769,3678 4947,3678 4980,3711 C47.2@4980,3770 L1.2@5318.27,3770
NetC44_2: C44.2 DA1.6 | length 517.2
  Top Layer w12: DA1.6@4800,4110 5044,4110 5100,4054 C44.2@5100,3860
NetC45_1: C45.1 DA1.2 R36.2 | length 456.2
  Top Layer w12: DA1.2@4600,4110 4603,4107 4603,3855 C45.1@4603,3655
NetC46_2: C46.2 DA1.5 | length 374
  Top Layer w12: C46.2@4740,3860 v2(4740,3933)
  Bottom Layer w12: DA1.5@4700,4210 4749,4161 4749,3942 v2(4740,3933)
NetC48_1: C48.1 C50.1 C51.2 DA2.3 L2.1 | length 1162.5
  Top Layer w12: DA2.3@6648,4210 6701,4157 6701,3821 6752,3770 C50.1@6808,3770 6808,3723 6843,3688 7025,3688 7047,3710 7047,3768 C51.2@7049,3770 L2.1@7302,3770
NetC48_2: C48.2 DA2.6 | length 532.9
  Top Layer w12: DA2.6@6848,4110 7104,4110 7169,4045 C48.2@7169,3860
NetC49_1: C49.1 DA2.2 R42.2 | length 466
  Top Layer w12: C49.1@6648,3655 DA2.2@6648,4121
NetC50_2: C50.2 DA2.5 | length 278.5
  Bottom Layer w12: DA2.5@6748,4210 6800,4158 6800,3953
NetC52_1: C52.1 C54.1 C55.2 DA3.3 L3.1 | length 1214
  Top Layer w12: DA3.3@8980,4210 9031,4159 9031,3807 9069,3769 C54.1@9119,3769 ; C54.1@9120,3770 C54.1@9119,3769 ; L3.1@9700,3770 C55.2@9360,3770 9360,3732 9326,3698 9152,3698 9119,3731 C54.1@9119,3769
NetC52_2: C52.2 DA3.6 | length 512.5
  Top Layer w12: DA3.6@9180,4110 9416,4110 9480,4046 C52.2@9480,3860
NetC53_1: C53.1 DA3.2 R48.2 | length 455.4
  Top Layer w12: DA3.2@8980,4110 8981,4109 C53.1@8981,3655
NetC54_2: C54.2 DA3.5 | length 374.4
  Top Layer w12: C54.2@9120,3860 9120,3935 v2(9129,3944)
  Bottom Layer w12: DA3.5@9080,4210 9130,4160 v2@9130,3944
NetC56_1: C56.1 C58.1 C59.2 DA4.3 L4.1 | length 1201.1
  Top Layer w12: DA4.3@11120,4210 11169,4161 11169,3789 11188,3770 C58.1@11260,3770 11260,3728 11282,3706 11472,3706 11499,3733 C59.2@11499,3768 ; C59.2@11501,3770 C59.2@11499,3768 ; L4.1@11820,3770 11818,3768 C59.2@11499,3768
NetC56_2: C56.2 DA4.6 | length 526.4
  Top Layer w12: DA4.6@11320,4110 11579,4110 11620,4069 11620,3861 C56.2@11621,3860
NetC57_1: C57.1 DA4.2 R54.2 | length 455
  Top Layer w12: C57.1@11120,3655 DA4.2@11120,4110
NetC58_2: C58.2 DA4.5 | length 276.3
  Bottom Layer w12: DA4.5@11220,4210 11269,4161 11269,3954
NetDA1_16: DA1.16 DD15.4 | length 1678.6
  Top Layer w12: v2@4180,5329 DD15.4@4180,5585.67 ; DA1.16@4800,4610 4851,4661 v2(4851,5339)
  Bottom Layer w12: v2@4180,5328 4849,5328 v2@4851,5330
  other v2: 4180,5339
NetDA1_36: DA1.36 DD15.10 | length 1862.1
  Top Layer w12: DD15.10@4230,5794.33 4230,5740 4195,5705 4032,5705 3964,5637 3964,4519 4020,4463 4247,4463 DA1.36@4300,4410
NetDA2_4: DA2.4 R43.1 | length 325
  Top Layer w12: DA2.4@6748,4110 6929,3929 R43.1@6929,3860
NetDA2_16: DA2.16 DD19.4 | length 1712
  Top Layer w12: v2(6180,5339) DD19.4@6180,5585.67 ; DA2.16@6848,4610 6897,4659 v2(6897,5339)
  Bottom Layer w12: v2@6180,5340 v2@6896,5340
NetDA2_36: DA2.36 DD19.10
NetDA3_4: DA3.4 R49.1 | length 316.3
  Top Layer w12: DA3.4@9080,4110 9240,3950 R49.1@9240,3860
NetDA3_16: DA3.16 DD23.4 | length 1581.1
  Top Layer w12: v2(8640,5339) DD23.4@8640,5585.67 ; DA3.16@9180,4610 9227,4657 v2(9227,5339)
  Bottom Layer w12: v2@8640,5340 v2@9226,5340
NetDA3_36: DA3.36 DD23.10 | length 2588.9
  Top Layer w12: v1(8200,5980) 8200,4640 8380,4460 8630,4460 DA3.36@8680,4410 ; DD23.10@8690,5794.33 v1(8690,5979)
  Bottom Layer w12: v1(8200,5980) v1@8689,5980
NetDA4_4: DA4.4 R55.1 | length 316.7
  Top Layer w12: DA4.4@11220,4110 11381,3949 R55.1@11381,3860
NetDA4_16: DA4.16 DD27.4 | length 1680
  Top Layer w12: v2(10700,5339) DD27.4@10700,5595 ; DA4.16@11320,4610 11373,4663 v2@11373,5339
  Bottom Layer w12: v2(10700,5339) v2@11373,5339
  other v2: 11373,5337
NetDA4_36: DA4.36 DD27.10 | length 2421
  Top Layer w12: v1(10315,5949) 10315,4773 10632,4456 10774,4456 DA4.36@10820,4410 ; DD27.10@10750,5794.33 v1(10750,5949)
  Bottom Layer w12: v1(10315,5949) v1(10750,5949)
NetDD3_4: DD3.4 DD3.6 DD3.8 DD3.11 DD3.13 DD3.15 DD3.18
NetDD5_4: DD5.4 DD5.11 R32.1
NetDD9_11: DD9.11 DD9.13 DD9.15 DD9.17 DD9.18 | length 866.6
  Top Layer w12: DD9.18@5469,10461.1 5469,10541 5484,10556 5699,10556 5719,10536 5719,10390 5734,10375 5809,10375 5819,10385 DD9.11@5819,10461.1 ; DD9.17@5519,10461.1 5519,10556 ; DD9.15@5619,10461.1 5619,10556
NetDD13_2: DD13.2 R35.1
NetDD13_4: DD13.4 R41.1
NetDD13_6: DD13.6 R47.1
NetDD13_8: DD13.8 R53.2
NetDD14_33: DD14.33 DD14.35 R33.1 | length 476.6
  Top Layer w12: R33.1@3740,7472 DD14.33@3945.72,7472 ; DD14.35@3946.81,7402.4 4048,7402.4 ; DD14.33@3946.81,7470.91 4049.09,7470.91 4049.09,7403.5
NetDD14_43: DD14.43 DD15.8 | length 1642
  Top Layer w12: DD14.43@3946.81,7128.39 4201.61,7128.39 4263,7067 v1(4263,6429) ; v1(4263,6216) 4263,6094 4330,6027 DD15.8@4330,5794.33
  Bottom Layer w12: v1(4263,6216) v1(4263,6429)
NetDD14_66: DD14.66 R34.1
NetDD18_1: DD18.1 R40.1
NetDD18_33: DD18.33 DD18.35 R38.1
NetDD18_66: DD18.66 R39.1
NetDD22_2: DD22.2 DD23.5 DD23.11 | length 229.4
  Top Layer w12: DD23.11@8640,5794.33 8640,5721 8690,5671 DD23.5@8690,5585.67
NetDD22_33: DD22.33 DD22.35 R44.1
NetDD22_43: DD22.43 DD23.8 | length 906.4
  Top Layer w12: DD22.43@8286.81,7128.39 8514.61,7128.39 8590,7053 8590,6481
NetDD22_66: DD22.66 R45.1
NetDD22_128: DD22.128 R46.1
NetDD23_2: DD23.2 DD23.3 DD23.13 | length 455.4
  Top Layer w12: DD23.13@8540,5794.33 8540,5488 8541,5487 8590,5487 DD23.3@8590,5585.67
NetDD26_1: DD26.1 DD26.128 R52.1
NetDD26_2: DD26.2 DD27.5 DD27.11 | length 229.4
  Top Layer w12: DD27.11@10700,5794.33 10700,5718 10750,5668 DD27.5@10750,5585.67
NetDD26_33: DD26.33 DD26.35 R51.1
NetDD26_43: DD26.43 DD27.8 | length 903
  Top Layer w12: DD26.43@10526.81,7128.39 10682.61,7128.39 10815,6996 10815,6436
NetDD26_66: DD26.66 R50.1
NetDD27_2: DD27.2 DD27.3 DD27.13 | length 426
  Top Layer w12: DD27.13@10600,5794.33 10600,5500 10648,5500 DD27.3@10648,5583.67
NetDD30_3: DD30.3 DD30.13
NetDD30_6: DD30.6 DD30.9
NetDD30_8: DD30.8 DD30.12
NetDD30_11: DD30.11 DD31.12
NetDD32_5: DD32.5 R56.2
P04: DA3.22 DA10.6 DD22.82 | length 1838.8
  Top Layer w12: DA10.6@8880,5230 8951.38,5301.38 DD22.82@8951.38,6326.81 ; DA3.22@8980,4810 v2(8980,4998)
  Bottom Layer w12: DA10.6@8880,5230 8734,5084 8734,5022 8758,4998 v2(8980,4998)
P05: DA3.23 DA10.5 DD22.83 | length 1662.2
  Top Layer w12: DA3.23@8980,4710 8928,4762 8928,5082 8980,5134 8980,5645 8985.63,5650.63 DD22.83@8985.63,6326.81
P06: DA3.24 DA10.4 DD22.84 | length 1732
  Top Layer w12: DA3.24@8880,4810 v2(8880,5121) ; DD22.84@9019.88,6326.81 9019.88,5290.12 DA10.4@9080,5230
  Bottom Layer w12: v2(8880,5121) 9062,5121 9081,5140 9081,5229 DA10.4@9080,5230
P07: DA3.25 DA10.3 DD22.85 | length 2022.8
  Top Layer w12: v2(8827,5079) 8827,4763 DA3.25@8880,4710 ; DD22.85@9054.13,6326.81 9054.13,5437.87 9179,5313 DA10.3@9179,5229
  Bottom Layer w12: v2(8827,5079) 9143,5079 9179,5115 9179,5229 DA10.3@9180,5230
P08: DA3.26 DA10.2 DD22.89 | length 1994.2
  Top Layer w12: DA3.26@8780,4810 v2@8780,5022 ; DD22.89@9191.14,6326.81 9191.14,5529.86 9280,5441 DA10.2@9280,5230
  Bottom Layer w12: v2(8780,5031) 8781,5032 9195,5032 9280,5117 DA10.2@9280,5230
R01: DA3.32 DA9.5 DD22.127 | length 4138.7
  Top Layer w12: DD22.127@9513.19,7436.65 9753.35,7436.65 9871,7319 9871,5306 9472,4907 9472,4798 DA9.5@9560,4710
  Bottom Layer w12: DA3.32@8680,4610 9085,4610 9134,4659 9381,4659 9432,4710 DA9.5@9560,4710
R02: DA3.33 DA9.4 DD22.126 | length 4299
  Top Layer w12: DD22.126@9513.19,7402.4 9752.6,7402.4 9841,7314 9841,5309.94 9448,4916.94 9448,4722 DA9.4@9560,4610
  Bottom Layer w12: DA3.33@8580,4510 8629,4559 9369,4559 9420,4610 DA9.4@9560,4610
R03: DA3.34 DA9.3 DD22.122 | length 4092.7
  Top Layer w12: DD22.122@9513.19,7265.39 9720.61,7265.39 9753,7233 9753,5257.3 9423,4927.3 9423,4647 DA9.3@9560,4510
  Bottom Layer w12: DA3.34@8680,4510 8732,4458 9367,4458 9419,4510 DA9.3@9560,4510
R04: DA3.35 DA9.2 DD22.121 | length 4241.9
  Top Layer w12: DD22.121@9513.19,7231.14 9697.86,7231.14 9731,7198 9731,5267.82 9400,4936.82 9400,4570 DA9.2@9560,4410
  Bottom Layer w12: DA3.35@8580,4410 8627,4363 9409,4363 9456,4410 DA9.2@9560,4410
S04: DA4.22 DA12.6 DD26.82 | length 1869.4
  Top Layer w12: 11020,5210 11191.38,5381.38 DD26.82@11191.38,6326.81 ; DA4.22@11120,4810 v2(11120,4998)
  Bottom Layer w12: 11020,5210 10887,5077 10887,5009 10898,4998 v2(11120,4998)
S05: DA4.23 DA12.5 DD26.83 | length 1702
  Top Layer w12: DA4.23@11120,4710 11070,4760 11070,5080 11120,5130 11120,5210 11225.63,5315.63 DD26.83@11225.63,6326.81
S06: DA4.24 DA12.4 DD26.84 | length 1739.7
  Top Layer w12: DA4.24@11020,4810 v2@11020,5129 ; 11220,5210 11259.88,5249.88 DD26.84@11259.88,6326.81
  Bottom Layer w12: v2(11020,5121) 11197,5121 11220,5144 11220,5219 DA12.4@11222,5221
S07: DA4.25 DA12.3 DD26.85 | length 1975
  Top Layer w12: v2(10969,5079) 10969,4761 DA4.25@11020,4710 ; DD26.85@11294.13,6326.81 11294.13,5235.87 11320,5210
  Bottom Layer w12: v2(10969,5079) 11278,5079 11318,5119 11318,5208 11320,5210
S08: DA4.26 DA12.2 DD26.89 | length 1995
  Top Layer w12: DA4.26@10920,4810 v2@10920,5028 ; 11420,5210 11420,5887 11431.14,5898.14 DD26.89@11431.14,6326.81
  Bottom Layer w12: v2(10920,5031) 11380,5031 11420,5071 11420,5210
T01: DA4.32 DA11.5 DD26.127 | length 4137.3
  Top Layer w12: DA11.5@11740,4710 11684,4766 11684,4941 12068,5325 12068,7355 11986.35,7436.65 DD26.127@11753.19,7436.65
  Bottom Layer w12: DA4.32@10820,4610 10866,4656 11515,4656 11569,4710 DA11.5@11740,4710
T02: DA4.33 DA11.4 DD26.126 | length 4304.4
  Top Layer w12: DA11.4@11740,4610 11662,4688 11662,4950.11 12046,5334.11 12046,7345 11988.6,7402.4 DD26.126@11753.19,7402.4
  Bottom Layer w12: DA4.33@10720,4510 10774,4564 11578,4564 11624,4610 DA11.4@11740,4610
T03: DA4.34 DA11.3 DD26.122 | length 4063
  Top Layer w12: DA11.3@11740,4510 11638,4612 11638,4960.05 11960,5282.05 11960,7205 11899.61,7265.39 DD26.122@11753.19,7265.39
  Bottom Layer w12: DA4.34@10820,4510 10869,4461 11535,4461 11584,4510 DA11.3@11740,4510
T04: DA4.35 DA11.2 DD26.121 | length 4230.9
  Top Layer w12: DA11.2@11740,4410 11614,4536 11614,4969.99 11936,5291.99 11936,7197 11901.86,7231.14 DD26.121@11753.19,7231.14
  Bottom Layer w12: DA4.35@10720,4410 10770,4360 11512,4360 11562,4410 DA11.2@11740,4410
VAA: C1.1 L1.1 L2.2 L3.2 L4.2 XT1.25A XT1.25B XT1.25C | length 705.8
  Top Layer w12: L1.1@5460,3770 v2@5591,3770 ; L2.2@7440.46,3766 v2(7581.73,3766) ; L3.2@9841.73,3770 v2(9984,3770) ; L4.2@11961.73,3770 v2(12041,3770)
  Top Layer w36: C1.1@11540,11200 v3(11540,11412)
  other v2: 5588,3771
VCC: C2.1 C3.2 C4.2 C5.2 C6.2 C7.2 C8.2 C9.2 C10.2 C11.2 C12.2 C13.2 C14.2 C15.2 C16.2 C17.2 C18.2 C19.2 C20.2 C21.2 C22.2 C23.2 C24.2 C25.2 C26.2 C27.2 C28.2 C29.2 C30.2 C31.2 C32.2 C33.2 C34.2 C35.2 C36.2 C37.2 C38.2 C39.2 C40.2 C41.2 C42.2 C43.2 C60.1 DA1.17 DA1.28 DA1.39 DA2.17 DA2.28 DA2.39 DA3.17 DA3.28 DA3.39 DA4.17 DA4.28 DA4.39 DA5.1 DA6.1 DA7.1 DA8.1 DA9.1 DA10.1 DA11.1 DA12.1 DD1.20 DD2.20 DD3.20 DD4.20 DD5.16 DD6.16 DD7.20 DD8.20 DD9.20 DD10.14 DD11.20 DD12.20 DD13.14 DD14.9 DD14.24 DD14.39 DD14.69 DD14.87 DD14.111 DD15.14 DD16.14 DD17.20 DD18.9 DD18.24 DD18.39 DD18.69 DD18.87 DD18.111 DD19.14 DD20.14 DD21.20 DD22.9 DD22.24 DD22.39 DD22.69 DD22.87 DD22.111 DD23.14 DD24.14 DD25.20 DD26.9 DD26.24 DD26.39 DD26.69 DD26.87 DD26.111 DD27.14 DD28.14 DD29.20 DD30.14 DD31.14 DD32.14 DD33.20 DD34.20 LED1.2 LED2.2 LED3.2 LED4.2 R29.1 R30.1 R31.1 R32.2 R33.2 R34.2 R38.2 R39.2 R40.2 R44.2 R45.2 R46.2 R50.2 R51.2 R52.2 R56.1 XT1.1A XT1.1B XT1.1C XT1.32A XT1.32B XT1.32C | length 1168.4
  Top Layer w12: C27.2@3740,7265 DD14.39@3946.42,7265 ; v1(5055,6889) DD14.111@5172.81,6889 ; C42.2@5917,5730 6007,5730 6030,5753 DD19.14@6030,5794.33 ; v1(7175,6889) DD18.111@7292.81,6889 ; v1(9395,6889) DD22.111@9512.81,6889 ; v1(11635,6889) DD26.111@11752.81,6889
  Top Layer w36: XT1.32C@6852,11378 6852,11342 6970,11224 C2.1@6970,11100
pads on no net: DA1.1 DA1.4 DA1.40 DA2.1 DA2.40 DA3.1 DA3.40 DA4.1 DA4.40 DD3.3 DD3.17 DD5.2 DD5.3 DD5.7 DD5.12 DD5.13 DD7.8 DD7.9 DD7.12 DD7.13 DD7.14 DD7.15 DD7.16 DD7.17 DD7.18 DD7.19 DD8.16 DD8.17 DD8.18 DD8.19 DD12.12 DD12.13 DD12.14 DD12.15 DD12.16 DD12.17 DD12.18 DD12.19 DD13.10 DD13.11 DD13.12 DD13.13 DD14.3 DD14.4 DD14.5 DD14.6 DD14.7 DD14.10 DD14.13 DD14.14 DD14.15 DD14.16 DD14.17 DD14.18 DD14.19 DD14.25 DD14.26 DD14.27 DD14.28 DD14.29 DD14.30 DD14.31 DD14.36 DD14.37 DD14.38 DD14.41 DD14.42 DD14.46 DD14.47 DD14.49 DD14.56 DD14.57 DD14.59 DD14.60 DD14.61 DD14.62 DD14.63 DD14.64 DD14.65 DD14.67 DD14.68 DD14.70 DD14.71 DD14.72 DD14.73 DD14.74 DD14.76 DD14.77 DD14.78 DD14.90 DD14.91 DD14.92 DD14.93 DD14.94 DD14.95 DD14.96 DD14.97 DD14.119 DD14.120 DD15.1 DD15.2 DD15.3 DD15.11 DD15.12 DD15.13 DD17.8 DD17.9 DD17.12 DD17.13 DD17.14 DD17.15 DD17.16 DD17.17 DD17.18 DD17.19 DD18.3 DD18.4 DD18.5 DD18.6 DD18.7 DD18.10 DD18.13 DD18.14 DD18.15 DD18.16 DD18.17 DD18.18 DD18.19 DD18.25 DD18.26 DD18.27 DD18.28 DD18.29 DD18.30 DD18.31 DD18.36 DD18.37 DD18.38 DD18.41 DD18.42 DD18.46 DD18.47 DD18.48 DD18.49 DD18.50 DD18.56 DD18.57 DD18.59 DD18.60 DD18.61 DD18.62 DD18.63 DD18.64 DD18.65 DD18.67 DD18.68 DD18.70 DD18.71 DD18.72 DD18.73 DD18.74 DD18.76 DD18.77 DD18.78 DD18.90 DD18.91 DD18.92 DD18.93 DD18.94 DD18.95 DD18.96 DD18.97 DD18.119 DD18.120 DD21.8 DD21.9 DD21.12 DD21.13 DD21.14 DD21.15 DD21.16 DD21.17 DD21.18 DD21.19 DD22.3 DD22.4 DD22.5 DD22.6 DD22.7 DD22.10 DD22.13 DD22.14 DD22.15 DD22.16 DD22.17 DD22.18 DD22.19 DD22.25 DD22.26 DD22.27 DD22.28 DD22.29 DD22.30 DD22.31 DD22.36 DD22.37 DD22.38 DD22.41 DD22.42 DD22.46 DD22.47 DD22.48 DD22.49 DD22.50 DD22.56 DD22.57 DD22.59 DD22.60 DD22.61 DD22.62 DD22.63 DD22.64 DD22.65 DD22.67 DD22.68 DD22.70 DD22.71 DD22.72 DD22.73 DD22.74 DD22.76 DD22.77 DD22.78 DD22.90 DD22.91 DD22.92 DD22.93 DD22.94 DD22.95 DD22.96 DD22.97 DD22.119 DD22.120 DD25.8 DD25.9 DD25.12 DD25.13 DD25.14 DD25.15 DD25.16 DD25.17 DD25.18 DD25.19 DD26.3 DD26.4 DD26.5 DD26.6 DD26.7 DD26.10 DD26.13 DD26.14 DD26.15 DD26.16 DD26.17 DD26.18 DD26.19 DD26.25 DD26.26 DD26.27 DD26.28 DD26.29 DD26.30 DD26.31 DD26.36 DD26.37 DD26.38 DD26.41 DD26.42 DD26.46 DD26.47 DD26.48 DD26.49 DD26.50 DD26.56 DD26.57 DD26.59 DD26.60 DD26.61 DD26.62 DD26.63 DD26.64 DD26.65 DD26.67 DD26.68 DD26.70 DD26.71 DD26.72 DD26.73 DD26.74 DD26.76 DD26.77 DD26.78 DD26.90 DD26.91 DD26.92 DD26.93 DD26.94 DD26.95 DD26.96 DD26.97 DD26.119 DD26.120 DD27.1 DD31.1 DD31.2 DD31.3 DD31.4 DD31.5 DD31.6 DD31.8 DD31.9 DD31.10 DD32.3 DD32.11 DD34.3 DD34.5 DD34.7 DD34.13 DD34.15 DD34.17 R37.1 XT1.3 XT1.4 XT1.4C XT1.5B XT1.5C XT1.9C XT1.10B XT1.10C XT1.11B XT1.13B XT1.14B XT1.15B
copper on no net: | length 316.3
  Top Layer w12: 4700,4110 4860,3950 4860,3860

## Polygon pours and split planes (outlines as drawn)
VCC on VCC (split plane): 12427.61,3168.39 3219.39,3168.39 3219.39,11789.61 12427.61,11789.61
VAA on VCC (split plane): 6193.59,11619.76 6193.59,11309 6195.17,11305.17 6276.17,11224.17 6280,11222.59 7035,11222.59 7038.83,11224.17 7256.24,11441.59 12028.76,11441.59 12062.59,11407.76 12062.59,3751.24 11950.76,3639.41 5469.24,3639.41 5440.41,3668.24 5440.41,3813.76 5464.24,3837.59 11826,3837.59 11829.83,3839.17 11966.83,3976.17 11967.29,3977.29 11968.41,3980 11968.41,11291.76 11996.83,11320.17 11998.41,11324 11998.41,11343 11997.29,11345.71 11996.83,11346.83 11962.83,11380.83 11959,11382.41 7312,11382.41 7308.17,11380.83 7073.76,11146.41 6244.24,11146.41 6107.41,11283.24 6107.41,11567.59 6108.41,11570 6108.41,11613.76 6126.24,11631.59 6181.76,11631.59
GND on GND (split plane): 12427.61,3168.39 3219.39,3168.39 3219.39,11789.61 12427.61,11789.61
B110 on GND (split plane): 6301.59,11624.76 6301.59,11309 6303.17,11305.17 6384.17,11224.17 6388,11222.59 7035,11222.59 7038.83,11224.17 7256.24,11441.59 12028.76,11441.59 12061.59,11408.76 12061.59,3685.24 11909.76,3533.41 3809.24,3533.41 3752.41,3590.24 3752.41,3974 3752.41,4086.76 3819.24,4153.59 11831,4153.59 11834.83,4155.17 11962.83,4283.17 11964.41,4287 11964.41,11377 11962.83,11380.83 11959,11382.41 7315,11382.41 7311.17,11380.83 7076.76,11146.41 6369.24,11146.41 6203.41,11312.24 6203.41,11619.76 6221.24,11637.59 6288.76,11637.59

## Other copper
VCC (plane layer: these items are gaps in the copper):
  lines w10: 5435,3666 5435,3816 5462,3843 11826,3843 11963,3980 11963,11294 11993,11324 11993,11343 11959,11377 7348,11377 7312,11377 7076,11141 6473,11141 6242,11141 6102,11281 6102,11569 6103,11570 6103,11616 6124,11637 6184,11637 6198,11623 6199,11622 6199,11309 6280,11228 7035,11228 7254,11447 12031,11447 12068,11410 12068,3749 11953,3634 5467,3634 5435,3666
GND (plane layer: these items are gaps in the copper):
  lines w10: 3747,3588 3747,3974 3747,4089 3817,4159 11831,4159 11959,4287 11959,11377 7315,11377 7079,11141 6367,11141 6198,11310 6198,11622 6219,11643 6291,11643 6307,11627 6307,11309 6388,11228 7035,11228 7254,11447 12031,11447 12067,11411 12067,3683 11912,3528 3807,3528 3747,3588

## Text inside footprints (layer, text, board x,y; h text height)
C1: Top Overlay "+" at 11400,11185 h60
C2: Top Overlay "+" at 7110,11115 h60 r180